# EAGLE board SparkFun_TSL2561_Sensor_Breakout (EAGLE 7.2.0)
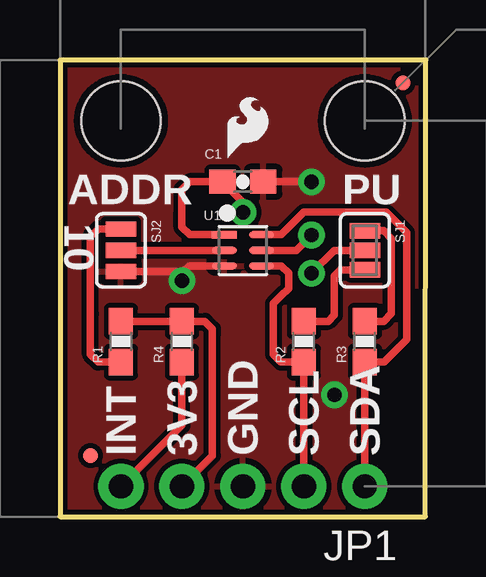
[diagram p0: board, top side]
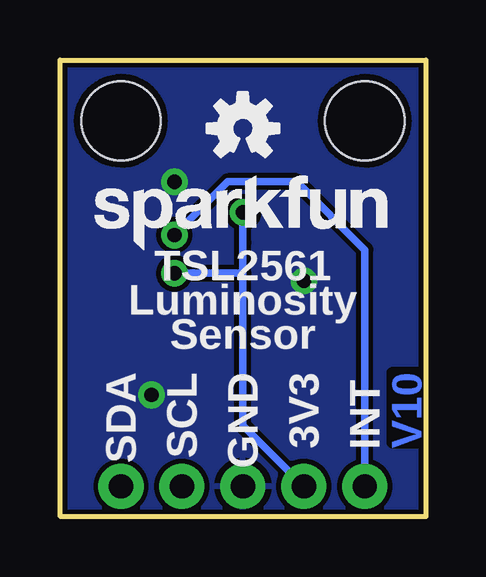
[diagram p1: board, bottom side, seen from below]

Size 15.24 x 19.05 mm. Coordinates in mm from the lower left corner, seen from the top.
Outline: 0,0 15.22,0 15.24,19.05 0,19.05 0,0
Copper layers (1*16): Top 0.035mm / dielectric 1.5mm / Bottom 0.035mm
Design rules "SparkFun": minimum track width 7mil, minimum drill 15mil, track to track 8mil, track to pad 8mil, pad to pad 8mil, via to via 8mil, smd to smd 8mil, copper to edge 8mil, drill to drill 8mil, minimum pad ring 12mil, minimum via ring 10mil, stop-mask expansion 4mil, vias tented up to drill 20mil, thermal gap 10mil

## Footprints (pad centres in the part's own frame; a part is rotated, then mirrored left to right if it is on the bottom)
0603-CAP = smd 1.1 x 1: 1 -0.85,0; 2 0.85,0
MICRO-FIDUCIAL = smd 0.635 x 0.635: 1 0,0
1X05_NO_SILK = drill 1.016 pad 1.88: 1 0,0; 2 2.54,0; 3 5.08,0; 4 7.62,0; 5 10.16,0
0603-RES = smd 1.1 x 1: 1 -0.85,0; 2 0.85,0
PAD-JUMPER-3-NC_BY_PASTE_YES_SILK_FULL_BOX = smd 0.635 x 1.27: 1 -0.813,0; 2 0,0; 3 0.813,0
SJ_3 = smd 0.635 x 1.27: 1 -0.889,0; 2 0,0; 3 0.889,0
STAND-OFF = hole 3.302: 0,0
FN-6 = smd 1.05 x 0.3: 1 -0.775,0.65; 2 -0.775,0; 3 -0.775,-0.65; 4 0.775,-0.65; 5 0.775,0; 6 0.775,0.65

## Placement (x,y rotation side)
C1  0.1uF  [0603-CAP]  7.62,13.97 0 top
FID1  FIDUCIALUFIDUCIAL  [MICRO-FIDUCIAL]  1.27,2.54 0 top
FID2  FIDUCIALUFIDUCIAL  [MICRO-FIDUCIAL]  14.29,18.1 0 top
FRAME1  FRAME-LETTER  [CREATIVE_COMMONS]  -22.86,-10.16 0 top  (outside the outline)
JP1  [1X05_NO_SILK]  12.7,1.27 180 top
LOGO1  OSHW-LOGOS  [OSHW-LOGO-S]  7.62,16.19 0 bottom
LOGO2  LOGO-SFENW2  [SFE-NEW-WEB]  13.81,11.11 0 bottom
LOGO3  SFE_LOGO_FLAME.1_INCH  [SFE_LOGO_FLAME_.1]  6.67,14.61 0 top
R1  10K  [0603-RES]  2.54,7.3 90 top
R2  4.7K  [0603-RES]  10.16,7.3 90 top
R3  4.7K  [0603-RES]  12.7,7.3 90 top
R4  10K  [0603-RES]  5.08,7.3 90 top
SJ1  JUMPER-PAD-3-NC_BY_PASTE  [PAD-JUMPER-3-NC_BY_PASTE_YES_SILK_FULL_BOX]  12.7,11.11 270 top
SJ2  [SJ_3]  2.54,11.11 270 top
STANDOFF1  STAND-OFF  [STAND-OFF]  2.54,16.51 0 top
STANDOFF2  STAND-OFF  [STAND-OFF]  12.7,16.51 0 top
U1  TSL2561FN  [FN-6]  7.62,11.11 0 top

## Library data of the parts
C1 = SparkFun-Capacitors; PROD_ID: CAP-00810
FID1 FID2 FRAME1 LOGO1-LOGO3 = SparkFun-Aesthetics
JP1 = SparkFun-Connectors
R1 R4 = SparkFun-Resistors; PROD_ID: RES-00824
R2 R3 = SparkFun-Resistors; PROD_ID: RES-07857
SJ1 = SparkFun-Passives
SJ2 = mike-temp
STANDOFF1 STANDOFF2 = SparkFun-Electromechanical
U1 = SparkFun-DigitalIC; PROD_ID: IC-11791

## Nets
3.3V: C1.1 JP1.4 R1.2 R4.2 SJ1.2 U1.1
GND: C1.2 JP1.3 SJ2.3 U1.3
INT: JP1.5 R4.1 U1.5
N$2: R1.1 SJ2.1
N$3: SJ2.2 U1.2
N$8: R3.2 SJ1.1
N$9: R2.2 SJ1.3
SCL: JP1.2 R2.1 U1.4
SDA: JP1.1 R3.1 U1.6

## Tracks (layer width: path | path; a pad name or v marks a point on that pad's centre or on a via)
3.3V  (via drill 0.6)
  Top 0.305: U1.1 5.4,11.76 5.08,12.08 5.08,12.7 5.08,13.65 5.4,13.97 C1.1 7.62,13.12 v7.62,12.7 | JP1.4 6.35,2.54 6.35,7.62 6.35,7.83 6.03,8.15 R4.2 R1.2 | SJ1.2 11.43,11.11 v10.48,10.16
  Bottom 0.305: v10.48,10.16 7.62,10.16 | 7.62,10.16 7.62,11.43 v7.62,12.7 | JP1.4 7.62,3.81 7.62,10.16
GND  (via drill 0.6)
  Top 0.305: U1.3 5.38,10.46 5.14,10.22 SJ2.3 2.54,10.16 | C1.2 v10.48,13.97
  other vias: 5.08,9.84 11.43,5.08
  pour Top: 0,19.05 15.24,19.05 15.24,0 0,0
  pour Bottom: 0,19.05 15.24,19.05 15.24,0 0,0
INT  (via drill 0.6)
  Top 0.305: JP1.5 5.08,3.81 R4.1 | U1.5 9.84,11.11 v10.48,11.75
  Bottom 0.305: JP1.5 2.54,11.13 5.38,13.97 8.26,13.97 v10.48,11.75
N$2
  Top 0.305: SJ2.1 1.59,12 1.27,11.68 1.27,8.47 1.27,6.77 1.59,6.45 R1.1
N$3
  Top 0.305: U1.2 SJ2.2
N$8
  Top 0.305: R3.2 13.49,8.15 13.81,8.47 13.81,11.61 13.49,11.93 SJ1.1
N$9
  Top 0.305: R2.2 11.18,8.15 11.43,8.41 11.43,10.05 11.68,10.3 SJ1.3
SCL
  Top 0.305: JP1.2 R2.1 9.21,6.45 8.89,6.77 8.89,8.89 9.21,9.21 9.53,9.53 9.53,10.16 9.22,10.46 U1.4
SDA
  Top 0.305: JP1.1 R3.1 13.51,6.45 14.45,7.39 14.45,11.84 13.59,12.7 10.16,12.7 9.22,11.76 U1.6

## Text on the board
Bottom: V10
tPlace: ADDR | PU | 10 | INT | 3V3 | GND | SCL | SDA
bPlace: TSL2561 | Luminosity | Sensor | INT | 3V3 | GND | SCL | SDA
tValues: M Grusin
tDocu: 0.125 x 2